# Altium PCB FPGA_Frontpanel_3_V1.PcbDoc
Units mm, origin at the board's own origin, x right, y up, seen from the top; angles counter-clockwise.
Board outline 150 x 40 mm, 2 copper layers (Top Layer, Bottom Layer), stack 1.66 mm thick; 57 components, 24 nets, 128 pads, 42 vias.
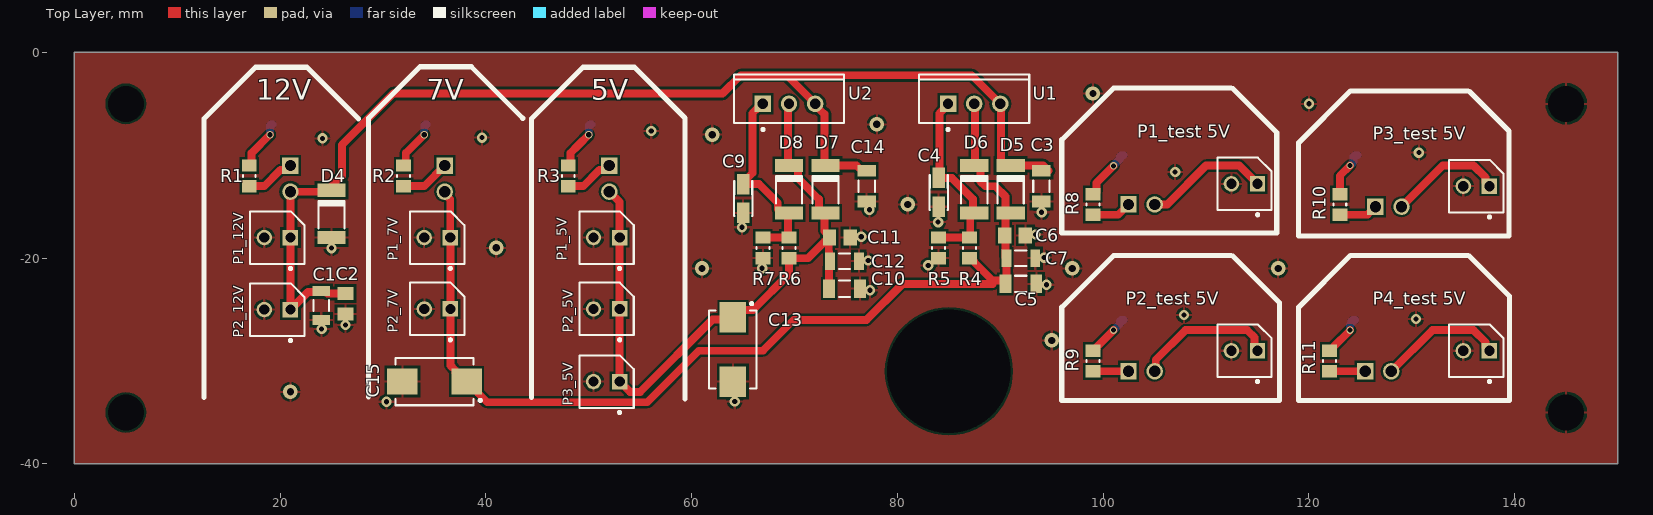
[diagram p0: Top Layer view]
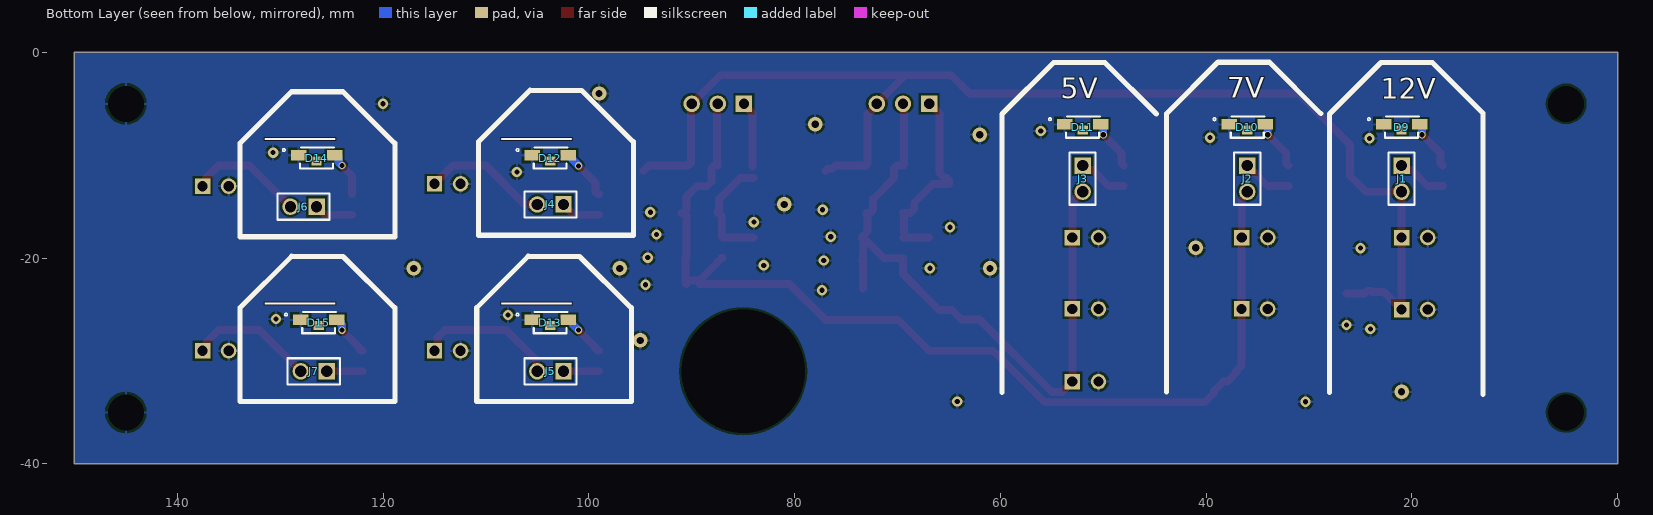
[diagram p1: Bottom Layer view, seen from below]
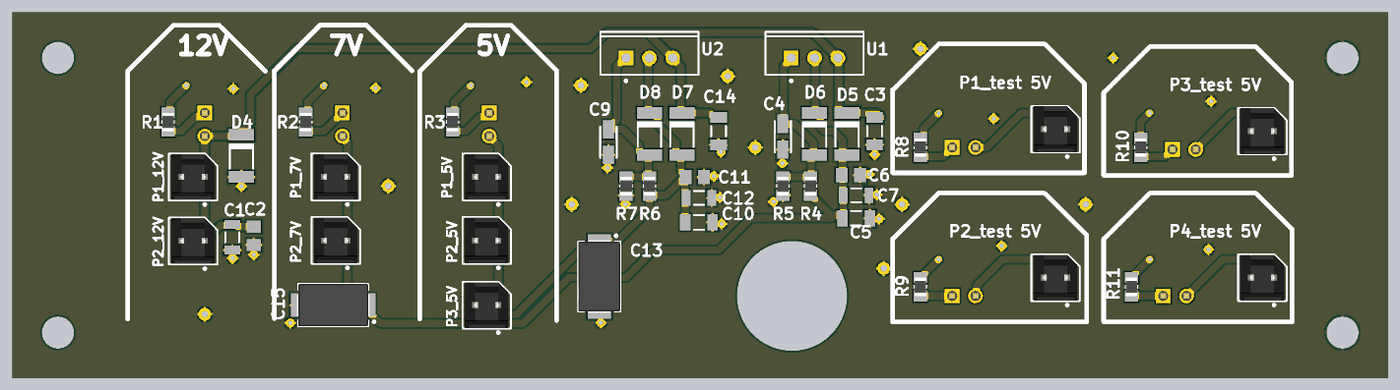
[diagram p2: 3D render of the assembled board from above, using the file's embedded part models]
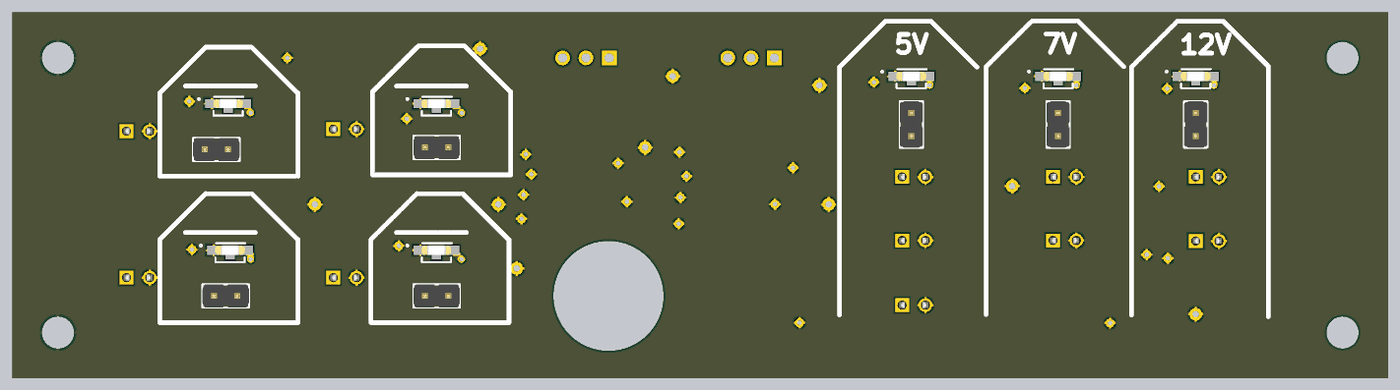
[diagram p3: 3D render of the assembled board from below, using the file's embedded part models]

## Layer stack, top to bottom
Top Solder: solder mask 0.0102, Solder Resist, Dk 3.5
Top Layer: signal copper 0.055
Dielectric1: dielectric 1.55, FR-4, Dk 4.8
Bottom Layer: signal copper 0.055
Bottom Solder: solder mask 0.0102, Solder Resist, Dk 3.5

## Board outline
0,-40 0,0 150,0 150,-40

## Design rules (kind name [scope] priority, off if disabled: settings)
Clearance clearance_polygons [InNamedPolygon('top_gnd_power')or InNamedPolygon('bottom_gnd_power') vs InNamedPolygon('top_gnd_uc')or InNamedPolygon('bottom_gnd_uc')] p1: gap=1.5 ignorepadtopadclearanceinfootprint=FALSE except(0: Arc-Hole Track-Hole SMDPad-Hole THPad-Hole Via-Hole Fill-Hole Poly-Hole Region-Hole Text-Hole)
Clearance ClearanceRoom [WithinRoom('less')  or WithinRoom('less1') or WithinRoom('less2') or WithinRoom('less3') or WithinRoom('less4')] p2: gap=0.15 ignorepadtopadclearanceinfootprint=FALSE
Clearance clearance_HP_class [InNetClass('high_power_net')] p3: gap=0.381 ignorepadtopadclearanceinfootprint=FALSE except(0: Arc-Hole Track-Hole SMDPad-Hole THPad-Hole Via-Hole Fill-Hole Poly-Hole Region-Hole Text-Hole)
Clearance "clearance_24V class" [InNetClass('24V_net')] p4: gap=0.254 ignorepadtopadclearanceinfootprint=FALSE except(0: Arc-Hole Track-Hole SMDPad-Hole THPad-Hole Via-Hole Fill-Hole Poly-Hole Region-Hole Text-Hole)
Clearance Clearance_1 [All] p5: gap=0.203 ignorepadtopadclearanceinfootprint=FALSE
FabricationTestPointUsage TestPointUsage [All] p1: valid=0 allowmultiple=FALSE
FabricationTestpoint Testpoint [All] p1: side=3 testpointundercomponent=TRUE minsize=1.016 maxsize=2.54 preferedsize=1.524 minholesize=0 maxholesize=1.016 preferedholesize=0.813 testpointgrid=0.025 allowsidetop=TRUE allowsidebottom=TRUE usegrid=TRUE gridtolerance=0
HoleSize [All] p1: absolutevalues=TRUE maxlimit=6 minlimit=0.025 maxpercent=80.000 minpercent=20.000
PolygonConnect PolygonConnect_Power [(InNet('+5V') OR InNet('-24VBUS'))] p1: connectstyle=Relief reliefconductorwidth=2.54 reliefentries=4 polygonreliefangle="90 Angle" airgapwidth=0.254
PolygonConnect [All] p2: connectstyle=Relief reliefconductorwidth=0.254 reliefentries=4 polygonreliefangle="90 Angle" airgapwidth=0.254
RoutingVias ViasRoom [WithinRoom('less')  or WithinRoom('less1') or WithinRoom('less2') or WithinRoom('less3') or WithinRoom('less4')] p1: holewidth=0.3 width=0.45 viastyle="Through Hole" minholewidth=0.3 minwidth=0.45 maxholewidth=0.3 maxwidth=0.45
RoutingVias [All] p2: holewidth=0.5 width=0.7 viastyle="Through Hole" minholewidth=0.3 minwidth=0.5 maxholewidth=0.711 maxwidth=1.27
SilkToSolderMaskClearance SilkscreenOverComponentPads [IsPad] p1: minsilkscreentomaskgap=0.254 clearancetoexposedcopper=TRUE
SolderMaskExpansion [All] p1: expansion=0.102 istentingtop=FALSE
Width WidthRoom [WithinRoom('less')  or WithinRoom('less1') or WithinRoom('less2') or WithinRoom('less3') or WithinRoom('less4')] p1: maxlimit=0.3 minlimit=0.3 preferedwidth=0.3
Width Width_HC_class [InNetClass('High_Current_net')] p2: maxlimit=15.24 minlimit=1.524 preferedwidth=1.524
Width Width_HP_class [InNetClass('High_Power_net')] p3: maxlimit=1.016 minlimit=1.016 preferedwidth=1.016
Width "Width_24V class" [InNetClass('24V_net')] p4: maxlimit=0.762 minlimit=0.762 preferedwidth=0.762
Width Width_1 [All] p5: maxlimit=0.762 minlimit=0.762 preferedwidth=0.762 minimp=50.000000 maximp=50.000000 favimp=50.000000
26 further rules are at their usual default settings.

## Classes and differential pairs
net class 24V_net: +12V

## Components (designator, comment, footprint, x,y, rotation, side; value= is the part's Value field where it differs from the comment)
C1 "100uF" CAPC1206(3216)190_L 24,-24.6 r90 top
C2 "100n" CAPC2013X88X50ML20T25 26.35,-24.432 r90 top
C3 "CAP 10uF 25V 1206(3216)" CAPC1206(3216)190_N 94,-13 r90 top value=10uF
C4 "4,7 µF" "A Package" 84,-12.2 r270 top
C5 "10uF" CAPC1206(3216)190_N 92,-22.512 r180 top
C6 "100n" CAPC2013X88X50ML20T25 91.429,-17.781 r180 top
C7 "100uF" CAPC1206(3216)190_L 92,-20 r180 top
C9 "4,7 µF" "A Package" 65,-12.8 r270 top
C10 "10uF" CAPC1206(3216)190_N 74.855,-22.959 r180 top
C11 "100n" CAPC2013X88X50ML20T25 74.4,-18 r180 top
C12 "100uF" CAPC1206(3216)190_L 74.855,-20.291 r180 top
C13 "10 µF" KEMT-520-D_Low 64,-28.875 r270 top
C14 "CAP 10uF 25V 1206(3216)" CAPC1206(3216)190_N 77,-13 r90 top value=10uF
C15 "10 µF" KEMT-520-D_Low 35,-32 r180 top
D4 "LL4007" LL4007 25,-18 r90 top
D5 "LL4007" LL4007 91,-15.6 r90 top
D6 "LL4007" LL4007 87.46,-15.6 r90 top
D7 "LL4007" LL4007 73,-15.6 r90 top
D8 "LL4007" LL4007 69.46,-15.6 r90 top
D9 "155124GS73200" 1204 21,-7 r180 bottom
D10 "155124GS73200" 1204 36,-7 r180 bottom
D11 "155124GS73200" 1204 52,-7 r180 bottom
D12 "155124YS73200" 1204 103.75,-10 r180 bottom
D13 "155124YS73200" 1204 103.75,-26 r180 bottom
D14 "155124YS73200" 1204 126.46,-10 r180 bottom
D15 "155124YS73200" 1204 126.25,-26 r180 bottom
J1 "61300211121" 61300211121 21,-11 r270 bottom
J2 "61300211121" 61300211121 36,-11 r270 bottom
J3 "61300211121" 61300211121 52,-11 r270 bottom
J4 "61300211121" 61300211121 102.46,-14.781 r0 bottom
J5 "61300211121" 61300211121 102.46,-31 r0 bottom
J6 "61300211121" 61300211121 126.46,-15 r0 bottom
J7 "61300211121" 61300211121 125.46,-31 r0 bottom
P1_5V "5V" 66100211622 53,-18 r0 top
P1_7V "5V" 66100211622 36.54,-18 r0 top
P1_12V "12V" 66100211622 21,-18 r0 top
"P1_test 5V" "66100211622" 66100211622 115,-12.781 r0 top
P2_5V "5V" 66100211622 53,-24.939 r0 top
P2_7V "5V" 66100211622 36.553,-24.939 r0 top
P2_12V "12V" 66100211622 21,-25 r0 top
"P2_test 5V" "66100211622" 66100211622 115,-29 r0 top
P3_5V "5V" 66100211622 53,-32 r0 top
"P3_test 5V" "66100211622" 66100211622 137.54,-13 r0 top
"P4_test 5V" "66100211622" 66100211622 137.54,-29 r0 top
R1 "21k" YAGO-RC0805_M 17,-12 r270 top
R2 "11k" YAGO-RC0805_M 32,-12 r270 top
R3 "6k8" YAGO-RC0805_M 48,-12 r270 top
R4 "270" YAGO-RC0805_M 87,-19 r270 top
R5 "1k" YAGO-RC0805_M 84,-19 r90 top
R6 "270" YAGO-RC0805_M 69.46,-19 r270 top
R7 "1k" YAGO-RC0805_M 66.92,-19 r90 top
R8 "330" YAGO-RC0805_M 99,-14.781 r270 top
R9 "330" YAGO-RC0805_M 99,-30 r270 top
R10 "330" YAGO-RC0805_M 123,-14.781 r270 top
R11 "330" YAGO-RC0805_M 122,-30 r270 top
U1 "LM317AT/NOPB" NDE0003A 87.46,-5 r0 top
U2 "LM317AT/NOPB" NDE0003A 69.46,-5 r0 top

## Footprints (in the part's own frame and the unit in brackets; to place one, negate y for a bottom-side part, rotate by r counter-clockwise, add the part's x,y. Pads: shape width x height; smd on the part's side, far side on the other; paste and mask are expansions set on the pad)
1204 [mm] "Chip LED, 2-Leads, Body 1.0x3.2mm"
  rect 1.5x1 smd: 1(-1.75,0) 2(1.75,0)
  rect 1x0.9 smd: 3(0,-0.55)
  silkscreen extent -3.3,-1.3 1.68,0.76, body extent -1.6,-0.5 1.6,0.5, height 1.49
61300211121 [mm] "2Pol; gerade; WR-PHD 2.54 mm THT Pin Header"
  rect 1.6x1.6 hole 1.1: 1(0,0)
  round 1.6 hole 1.1: 2(2.54,0)
  silkscreen extent -1.27,-1.27 3.81,1.27, body extent -1.27,-1.27 3.81,1.27, height 8.57
66100211622 [mm] "2 Pins, stehend 2.54mm Intercom Stiftleiste WR-WTB"
  rect 1.5x1.5 hole 1: 1(0,0)
  round 1.5 hole 1: 2(-2.54,0)
  silkscreen extent -3.91,-3.12 1.37,2.55, body extent -3.66,-2.5 1.12,2.5, height 11.33
"A Package" [mm] "A Package; Low Density"
  rect 2x1.2 smd: 1(0,0) 2(2.8,0)
  silkscreen extent -0.3,-0.9 3.1,0.9
CAPC1206(3216)190_L [mm] "Chip Capacitor, Body 3.2x1.6mm, Height 1.9mm, IPC High Density"
  rect 0.95x1.7 smd: 1(-1.4,0) 2(1.4,0)
  silkscreen extent -0.55,-0.75 0.55,0.75, body extent -1.7,-0.9 1.7,0.9, height 1.9
CAPC1206(3216)190_N [mm] "Chip Capacitor, Body 3.2x1.6mm, Height 1.9mm, IPC Medium Density"
  rect 1.15x1.8 smd: 1(-1.5,0) 2(1.5,0)
  silkscreen extent -0.55,-0.8 0.55,0.8, body extent -1.7,-0.9 1.7,0.9, height 1.9
CAPC2013X88X50ML20T25 [mm] "Chip Capacitor, 2-Leads, Body 2.00x1.25mm, IPC Low Density"
  rect 1.3x1.55 smd: 1(-1,0) 2(1,0)
  body extent -1.1,-0.72 1.1,0.72, height 0.88
KEMT-520-D_Low [mm] "Molded Capacitor, 2-Leads, Body 7.6x4.6mm, IPC Low Density"
  rect 2.95x2.55 smd: 1(-3.125,0) 2(3.125,0)
  silkscreen extent -4.57,-2.3 3.8,2.3, body extent -4.02,-2.3 4.02,2.3, height 3.1
LL4007 [mm] "MELF Diode, 2-Leads, Body 5,00x2,50mm, IPC High Density"
  rect 1.279x2.75 smd: 1(0,0) 2(4.6,0)
  silkscreen extent 0.9,-1.28 3.57,1.28, body extent -0.3,-1.34 4.9,1.35, height 2.69
NDE0003A [mm] "FM, 3-Leads, Body 10.7x4.7mm, Pitch 2.54mm"
  rect 1.6x1.6 hole 1: 1(-2.54,0)
  round 1.6 hole 1: 2(0,0) 3(2.54,0)
  silkscreen extent -5.35,-2.62 5.35,2.85, body extent -5.4,-1.9 5.4,2.9, height 19.4
YAGO-RC0805_M [mm] "Chip Resistor, 2-Leads, Body 2.00x1.25mm, IPC Low Density"
  rect 1.2x1.45 smd: 1(-1,0) 2(1,0)
  silkscreen extent -0.1,-0.63 0.1,0.63, body extent -1,-0.62 1,0.63, height 0.6

## Part data
C1 C7 C12: library part CMP-00469-2, "CAP 100uF 6.3V ±20% 1206 (3216 Metric) Thickness 1.9mm SMD", Case-EIA=1206, Case-Metric=3216, Manufacturer="WURTH ELEKTRONIK", Manufacturer Part Number=885012108005, Rated Voltage="6.3 V", Supplier Part Number=2495155, Tolerance=Â±20%, ComponentLink1Description=2326302.pdf, ComponentLink1URL=http://www.farnell.com/cad/2326302.pdf, ComponentLink2Description=1958456.pdf, ComponentLink2URL=http://www.farnell.com/datasheets/1958456.pdf, Max Thickness="1.9 mm", PartNumber=885012108005, Supplier=Farnell, Technology=SMT
C2 C6 C11: library part CMP-001-0082-2, "generic 0805 COG oder X7R Vielschichtkondensatoren max. +/-10%"
C3 C5 C10 C14: library part CMP-00471-2, "CAP 10uF 25V -20% to +80% 1206 (3216 Metric) Thickness 1.9mm SMD", Case-EIA=1206, Case-Metric=3216, Manufacturer="Wurth Electronics Inc.", Manufacturer Part Number=885012208069, Operating Temperature="-55°C ~ 125°C", Package / Case="1206 (3216 Metric)", PartNumber="885 012 208 069", Rated Voltage="25 V", Supplier Part Number=732-7574-2-ND, Temperature Coefficient=X7R, Tolerance="-20% to +80%", ComponentLink1Description=885012208069.pdf, ComponentLink1URL=http://katalog.we-online.de/pbs/datasheet/885012208069.pdf, Max Thickness="1.9 mm", Mounting Type="Surface Mount, MLCC", Packaging="Tape & Reel (TR)", Part Status=Active, Size / Dimension="0.126\" L x 0.063\" W (3.20mm x 1.60mm)", Supplier=Digi-Key, Technology=SMT, Thickness (Max)="0.075\" (1.90mm)"
C4: library part CMP-001-0039-5, "4,7 µF; 6V; Gr. A; T491A475K006AT", Capacitance=4.7µF, ESR (Equivalent Series Resistance)="6 Ohm", Lifetime @ Temp.="2000 Hrs @ 85°C", Manufacturer=KEMET, Manufacturer Size Code=A, Operating Temperature="-55°C ~ 125°C", Package / Case="1206 (3216 Metric)", PartNumber=T491A475K006AT, Supplier Part Number=399-9717-1-ND, Tolerance=±10%, Voltage - Rated=6.3V, ComponentLink1Description=KEM_T2005_T491.pdf, ComponentLink1URL=http://www.kemet.com/Lists/ProductCatalog/Attachments/254/KEM_T2005_T491.pdf, Failure Rate=-, Features="General Purpose", Height - Seated (Max)="0.071\" (1.80mm)", Lead Spacing=-, Mounting Type="Surface Mount", Packaging="Cut Tape (CT)", Part Status=Active, Size / Dimension="0.126\" L x 0.063\" W (3.20mm x 1.60mm)", Supplier=Digi-Key, Type=Molded
C9: library part CMP-001-0039-3, "4,7 µF; 6V; Gr. A; T491A475K006AT", Capacitance=4.7µF, ESR (Equivalent Series Resistance)="6 Ohm", Lifetime @ Temp.="2000 Hrs @ 85°C", Manufacturer=KEMET, Manufacturer Size Code=A, Operating Temperature="-55°C ~ 125°C", Package / Case="1206 (3216 Metric)", PartNumber=T491A475K006AT, Supplier Part Number=399-9717-1-ND, Tolerance=±10%, Voltage - Rated=6.3V, ComponentLink1Description=KEM_T2005_T491.pdf, ComponentLink1URL=http://www.kemet.com/Lists/ProductCatalog/Attachments/254/KEM_T2005_T491.pdf, Failure Rate=-, Features="General Purpose", Height - Seated (Max)="0.071\" (1.80mm)", Lead Spacing=-, Mounting Type="Surface Mount", Packaging="Cut Tape (CT)", Part Status=Active, Size / Dimension="0.126\" L x 0.063\" W (3.20mm x 1.60mm)", Supplier=Digi-Key, Type=Molded
C13 C15: library part CMP-001-0033-3, "10 µF, 35V, 125 mOhm, Gr. D / partnumb: T495D106K035ATE125", Capacitance=10µF, ESR (Equivalent Series Resistance)="125 mOhm", Lifetime @ Temp.="2000 Hrs @ 85°C", Manufacturer=KEMET, Manufacturer Size Code=D, Operating Temperature="-55°C ~ 125°C", Package / Case="2917 (7343 Metric)", PartNumber=T495D106K035ATE125, Supplier Part Number=399-10292-1-ND, Tolerance=±10%, Voltage - Rated=35V, ComponentLink1Description=docfinder?Partnumber=T495D106K035ATE300, ComponentLink1URL=http://www.kemet.com/docfinder?Partnumber=T495D106K035ATE300, Failure Rate=-, Features="General Purpose", Height - Seated (Max)="0.122\" (3.10mm)", Lead Spacing=-, Mounting Type="Surface Mount", Packaging="Cut Tape (CT)", Part Status=Active, Size / Dimension="0.287\" L x 0.169\" W (7.30mm x 4.30mm)", Supplier=Digi-Key, Type=Molded
D4 D5 D6 D7 D8: library part CMP-001-0049-2, "LL4007;  Vf 1,1V @ 1A, If = 1A", Betriebstemperatur, max.=175, Manufacturer="TAIWAN SEMICONDUCTOR", PartNumber="LL4007G L2", Supplier Part Number=2677381, Anzahl der Pins=-, Bauform - Diode=DO-213, ComponentLink1Description=2182652.pdf, ComponentLink1URL=http://www.farnell.com/datasheets/2182652.pdf, Diodenkonfiguration=Einfach, Durchlassspannung Vf max.=1.1, Durchlassstrom (mittlerer) If(AV)=1, Periodische Sperrspannung Vrrm, max.=1, Produktpalette=-, Sperrerholzeit Trr, max.=-, Spitzendurchlassstrom Ifsm, max.=25, Supplier=Farnell, SVHC="No SVHC (20-Jun-2016", Verpackung=Gurtabschnitt
D9 D10 D11: library part CMP-001-0164-1, "Single Color LED, Green, Water Clear, 2mm", Color=Green, Forward Current-Max=25mA, Max Operating Temperature=85°C, Min Operating Temperature=-40°C, Lens Style="WATER CLEAR", Luminous Intensity-Nom=600mcd, Mount="Surface Mount", Number of Functions=1, Number of Pins=3, Optoelectronic Device Type="SINGLE COLOR LED", Overall Height=1mm, Packaging="Tape and Reel", REACH SVHC=Yes, RoHS Compliant=Yes, Shape=Rectangular, Size=2mm, Viewing Angle=120°
D12 D13 D14 D15: library part CMP-00543-1, "Single Color LED, Yellow, Water Clear, 2mm", Color=Yellow, Forward Current-Max=25mA, Max Operating Temperature=85°C, Min Operating Temperature=-40°C, Lens Style="WATER CLEAR", Luminous Intensity-Nom=130mcd, Mount="Surface Mount", Number of Functions=1, Number of Pins=3, Optoelectronic Device Type="SINGLE COLOR LED", Overall Height=1mm, Packaging="Tape and Reel", REACH SVHC=Yes, RoHS Compliant=Yes, Shape=Rectangular, Size=2mm, Viewing Angle=120°
J1 J2 J3 J4 J5 J6 J7: library part CMP-001-0071-2, "2Pol; gerade; WR-PHD 2.54 mm THT Pin Header", Current Rating="3 A", Flammability Rating="UL 94 V-0", Insulation Resistance="1 GOhms", Manufacturer="Wurth Electronics", Supplier Part Number=710-61300211121, Voltage Rating="250 V", Accessory Type=-, Application="Wire to Board", Brand="Wurth Electronics", ComponentLink1Description=6130xx11121-538006.pdf, ComponentLink1URL=http://www.mouser.com/ds/2/445/6130xx11121-538006.pdf, Contact Gender="Pin (Male)", Contact Material="Copper Alloy", Contact Plating=Gold, Contact Type=-, Housing Gender=-, Housing Material="Polybutylene Terephthalate (PBT)", Latching Type=Unlatched, Manufacturer Part Number=61300211121, Mating Post Length="6 mm", Minimum Order Quantity=1, Mounting Angle=Straight, Mounting Style="Straight Pin", Number of Positions="2 Position", Number of Rows="1 Row", Packaging=Bulk, PartNumber=61300211121, Pitch="2.54 mm", Product=Headers, Reeling=False, RoHS - Mouser=Y, Row Spacing=-, Series=WR-PHD, Standard Pack Qty=1000, Supplier=Mouser, Termination Post Length="3 mm", Termination Style="Through Hole", Type="Pin Strip"
P1_5V P1_7V P1_12V P2_5V P2_7V P2_12V P3_5V: library part CMP-001-0161-A.3, "WR-WTB 2.54 mm Male Vertical Shrouded Header 2 Pins", Manufacturer="Wurth Electronics", PartNumber=66100211622, Supplier Part Number=732-14102-ND, Supplier=Digi-Key
"P1_test 5V" "P2_test 5V" "P3_test 5V" "P4_test 5V": library part CMP-001-0161-A.3, "WR-WTB 2.54 mm Male Vertical Shrouded Header 2 Pins", Manufacturer="Wurth Electronics", Supplier Part Number=732-14102-ND, PartNumber=66100211622, Supplier=Digi-Key
R1 R2 R3 R4 R5 R6 R7 R8 R9 R10 R11: library part CMP-001-0027-2, "0805 Yageo Standard BlackBox Resistors", Manufacturer=Yageo, Operating Temperature="-55°C ~ 155°C", Package / Case="0805 (2012 Metric)", Power (Watts)="0.125W, 1/8W", Supplier Device Package=0805, Temperature Coefficient=±200ppm/°C, Tolerance=±1%, ComponentLink1Description=PYu-RC_Group_51_RoHS_L_7.pdf, ComponentLink1URL=http://www.yageo.com/documents/recent/PYu-RC_Group_51_RoHS_L_7.pdf, Composition="Thick Film", Failure Rate=-, Features="Moisture Resistant", Height - Seated (Max)="0.024\" (0.60mm)", Packaging=Digi-Reel®, Part Status=Active, Size / Dimension="0.079\" L x 0.049\" W (2.00mm x 1.25mm)"
U1 U2: library part CMP-00535-1, "3-Terminal Adjustable Regulator, 3-pin TO-220, Pb-Free", Manufacturer="Texas Instruments", PackageTopMarking="NSUZXYTTE#*LM317AT P+", PowerWise=N, ComponentLink1Description="Datasheet URL", ComponentLink1URL=http://www.ti.com/general/docs/lit/getliterature.tsp?genericPartNumber=LM317-N&fileType=pdf, CompType="LDO IC", PackageDescription="TO-220, Molded, 3 Lead, Straight", PackageReference=NDE0003A, PinCount=3, RoHS=Y

## Free pads (board coordinates)
  round 3.302 hole 3.505 unplated: 0(5,-35) 0(5,-5) 0(145,-35) 0(145,-5)
  round 3.302 hole 12 unplated: 0(85,-31)

## Via types
v1: diameter 1, hole 0.5, Top Layer to Bottom Layer, 25 vias
v2: diameter 1.4, hole 0.711, Top Layer to Bottom Layer, 10 vias
v3: diameter 0.7, hole 0.5, Top Layer to Bottom Layer, 7 vias

## Nets (pads, with @x,y where several pads share a name; then routed paths per layer and width w, separated by ;. In a path a pad name is that pad's centre, name@x,y a point inside that pad or via, vN(x,y) a via of type N, cw(c..) or ccw(c..) an arc to the next point about the centre after c; other vN are vias at no path point)
+5V: C10.2 C11.2 C12.2 C13.1 D7.1 D8.2 J3.2 P1_5V.1 P2_5V.1 P3_5V.1 R6.2 U2.2 | length 66.9
  Top Layer w0.762: J3.2 53,-14.54 P1_5V.1 P2_5V.1 P3_5V.1 54,-33 55,-33 62.028,-25.972 63.778,-25.972 C13.1 64.722,-25.028 65.972,-25.028 69.465,-21.535 69.465,-20.005 71.3,-20.005 72.911,-18.394 73.131,-18.394 73.4,-18.125 C11.2 ; U2.2 69.36,-5.1 69.36,-10.9 D8.2 70.073,-11 70.331,-11.258 70.331,-12.236 72.359,-14.264 72.359,-15.342 72.617,-15.6 D7.1 73,-15.758 72.9,-15.858 72.9,-17.375 73.422,-17.897 C11.2@73.422,-18.002 ; C11.2@73.322,-18.399 73.322,-19.375 73.361,-19.414 73.361,-20.197 C12.2 73.361,-20.385 73.361,-20.76 73.355,-20.766 C10.2
+7V: C5.2 C6.2 C7.2 C15.1 D5.1 D6.2 J2.2 P1_7V.1 P2_7V.1 R4.2 U1.2 | length 101.2
  Top Layer w0.762: J2.2 36,-13.767 36.54,-14.307 P1_7V.1 36.553,-18.013 P2_7V.1 36.553,-30.428 37.031,-30.906 37.031,-31.106 37.925,-32 38.325,-32 39.219,-32.894 39.219,-33.094 40.125,-34 55.682,-34 60.682,-29 66.92,-29 69.92,-26 77,-26 80.488,-22.512 89.259,-22.512 ; R4.2 87.125,-20 87.425,-20.3 87.425,-20.353 89.259,-22.186 90.306,-22.186 90.5,-22.38 C5.2 90.6,-22.412 C7.2 90.514,-19.914 90.514,-17.867 C6.2 90.51,-17.7 90.51,-15.858 D5.1@90.768,-15.6 ; U1.2 87.541,-5.081 87.541,-10.919 D6.2 87.823,-11 88.081,-11.258 88.081,-12.562 88.528,-13.009 89.51,-13.009 90.51,-14.009 90.51,-15.342 D5.1@90.768,-15.6 ; D5.1 D5.1@90.768,-15.6
+12V: C1.2 C2.2 C3.2 C14.2 D4.2 D5.2 D7.2 J1.2 P1_12V.1 P2_12V.1 U1.3 U2.3 | length 119.5
  Top Layer w0.762: C2.2 24.607,-23.432 24.375,-23.2 C1.2 23.906,-23.294 22.706,-23.294 P2_12V.1 P1_12V.1 J1.2 24.46,-13.54 26,-12 26,-9 31,-4 63,-4 64.77,-2.23 69.23,-2.23 ; C14.2 76.806,-11.306 76.336,-11.306 76.035,-11.005 73.005,-11.005 D7.2 73,-10.842 72.9,-10.742 72.9,-6.005 72,-5.105 U2.3 69.23,-2.23 ; C3.2@94.675,-11.5 94.175,-11 D5.2 90.34,-11 90.081,-10.742 90.081,-5.081 U1.3 87.23,-2.23 69.23,-2.23
GND: "P1_test 5V.2" "P2_test 5V.2" "P3_test 5V.2" "P4_test 5V.2" C1.1 C2.1 C3.1 C4.2 C5.1 C6.1 C7.1 C9.2 C10.1 C11.1 C12.1 C13.2 C14.1 C15.2 D4.1 D9.1 D10.1 D11.1 D12.1 D13.1 D14.1 D15.1 P1_5V.2 P1_7V.2 P1_12V.2 P2_5V.2 P2_7V.2 P2_12V.2 P3_5V.2 pad.0@145,-5 pad.0@145,-35 R5.1 R7.1
  other v1: 30.33,-33.962 64.182,-33.926 24.036,-26.885 26.347,-26.494 130.393,-25.925 107.849,-25.534 77.339,-23.116 94.478,-22.583 66.849,-20.983 82.993,-20.698 77.161,-20.236 94.265,-19.951 24.996,-19.027 76.486,-17.925 93.412,-17.711 64.893,-17 83.953,-16.502 94.016,-15.542 77.268,-15.293 106.995,-11.631 130.678,-9.746 24.107,-8.359 39.611,-8.288 56.075,-7.648 120,-5
  other v2: 21,-33 95,-28 61,-21 97,-21 117,-21 41,-19 81,-14.781 62,-8 78,-7 99,-4
NetC4_1: C4.1 D6.1 R4.1 R5.2 U1.1 | length 17.7
  Top Layer w0.762: R5.2 84.009,-18.009 86.991,-18.009 87.081,-17.919 87.081,-15.858 87.34,-15.6 D6.1 87.46,-15.465 87.337,-15.342 87.337,-14.264 85.297,-12.224 84.219,-12.224 84.195,-12.2 C4.1 ; 84.081,-11.081 84.081,-5.929 84.501,-5.509 84.501,-5.419 U1.1
NetC9_1: C9.1 D8.1 R6.1 R7.2 U2.1 | length 19.8
  Top Layer w0.762: R7.2 66.925,-18.005 69.455,-18.005 R6.1 69.36,-17.9 69.36,-15.7 D8.1 68.724,-15.6 68.366,-15.242 68.366,-14.611 66.56,-12.805 65.219,-12.805 65.214,-12.8 C9.1 65,-12.4 65.219,-12.181 65.454,-12.181 65.9,-11.735 65.9,-5.925 66.406,-5.419 66.501,-5.419 U2.1
NetD9_2: D9.2 R1.1 | length 5
  Top Layer w0.762: R1.1 17.209,-10.791 17.209,-9.791 v3(19,-8)
  Bottom Layer w0.762: v3(19,-8) 19,-7.119 19.119,-7 D9.2
NetD10_2: D10.2 R2.1 | length 5
  Top Layer w0.762: R2.1 32.209,-10.791 32.209,-9.791 v3(34,-8)
  Bottom Layer w0.762: v3(34,-8) 34,-7.119 34.119,-7 D10.2
NetD11_2: D11.2 R3.1 | length 5
  Top Layer w0.762: R3.1 48.209,-10.791 48.209,-9.791 49,-9 v3(50,-8)
  Bottom Layer w0.762: v3(50,-8) 50,-7.119 50.119,-7 D11.2
NetD12_2: D12.2 R8.1 | length 5.2
  Top Layer w0.762: R8.1 99.125,-13.781 99.344,-13.562 99.344,-12.684 v3(101,-11.028)
  Bottom Layer w0.762: v3(101,-11.028) 101,-11 101.631,-10.369 101.631,-10.119 101.75,-10 D12.2
NetD13_2: D13.2 R9.1 | length 4.5
  Top Layer w0.762: R9.1 99.125,-29 99.344,-28.781 99.344,-28.656 v3(101,-27)
  Bottom Layer w0.762: v3(101,-27) 101.631,-26.369 101.631,-26.119 101.75,-26 D13.2
NetD14_2: D14.2 R10.1 | length 4.6
  Top Layer w0.762: R10.1 123,-12 v3(124,-11)
  Bottom Layer w0.762: v3(124,-11) 124.341,-10.659 124.341,-10.119 124.46,-10 D14.2
NetD15_2: D15.2 R11.1 | length 4.3
  Top Layer w0.762: R11.1 122.125,-29 122.344,-28.781 122.344,-28.656 v3(124,-27)
  Bottom Layer w0.762: v3(124,-27) 124,-26.5 124.131,-26.369 124.131,-26.119 124.25,-26 D15.2
NetJ1_1: J1.1 R1.2 | length 4.8
  Top Layer w0.762: R1.2 18.46,-13 20.041,-11.419 20.581,-11.419 J1.1
NetJ2_1: J2.1 R2.2 | length 4.8
  Top Layer w0.762: R2.2 34,-13 J2.1
NetJ3_1: J3.1 R3.2 | length 4.8
  Top Layer w0.762: R3.2 49.46,-13 51.041,-11.419 51.581,-11.419 J3.1
NetJ4_1: J4.1 R8.2 | length 3.9
  Top Layer w0.762: R8.2 101.46,-15.781 J4.1
NetJ4_2: "P1_test 5V.1" J4.2 | length 12.3
  Top Layer w0.762: J4.2 105.003,-14.779 106.221,-14.779 110,-11 113.219,-11 115,-12.781
NetJ5_1: J5.1 R9.2 | length 3.5
  Top Layer w0.762: R9.2 J5.1
NetJ5_2: "P2_test 5V.1" J5.2 | length 13.7
  Top Layer w0.762: J5.2 105.112,-30.888 105.112,-29.888 108,-27 114,-27 114.704,-27.704 114.704,-28.704 115,-29
NetJ6_1: J6.1 R10.2 | length 3.8
  Top Layer w0.762: R10.2 125.679,-15.781 J6.1
NetJ6_2: "P3_test 5V.1" J6.2 | length 11.3
  Top Layer w0.762: J6.2 133,-11 136,-11 137.171,-12.171 137.171,-12.631 137.54,-13
NetJ7_1: J7.1 R11.2 | length 3.5
  Top Layer w0.762: R11.2 J7.1
NetJ7_2: "P4_test 5V.1" J7.2 | length 12.3
  Top Layer w0.762: J7.2 132,-27 136,-27 137.171,-28.171 137.171,-28.631 137.54,-29
pads on no net: D9.3 D10.3 D11.3 D12.3 D13.3 D14.3 D15.3

## Polygon pours and split planes (outlines as drawn)
GND on Top Layer "top gnd" (solid, remove dead copper, pour order 0): 0,-40 0,0 150,0 150,-40
GND on Bottom Layer "bot gnd" (solid, remove dead copper, pour order 1): 0,-40 0,0 150,0 150,-40

## Silkscreen, mask and mechanical layers (free items; w line width, h text height)
Top Overlay:
  lines w0.5: 12.604,-33.514 12.604,-6.448 17.617,-1.435 ; 17.604,-1.448 22.604,-1.448 27.604,-6.448 ; 28.584,-33.47 28.584,-6.403 33.597,-1.39 ; 33.584,-1.403 38.584,-1.403 43.584,-6.403 ; 44.43,-33.514 44.43,-6.448 49.443,-1.435 ; 49.43,-1.448 54.43,-1.448 59.35,-6.369 59.35,-33.679 ; 95.969,-24.747 95.969,-33.836 117.129,-33.836 117.129,-24.338 112.607,-19.816 ; 95.969,-8.461 95.969,-17.551 116.874,-17.551 116.874,-7.797 112.608,-3.53 ; 96.022,-24.747 101.022,-19.747 112.426,-19.747 ; 96.023,-8.461 101.023,-3.461 112.426,-3.461 ; 118.969,-24.747 118.969,-33.836 139.497,-33.836 139.497,-23.706 135.607,-19.816 ; 118.969,-8.747 118.969,-17.836 139.446,-17.836 139.446,-7.655 135.607,-3.816 ; 119.022,-24.747 124.022,-19.747 135.426,-19.747 ; 119.022,-8.747 124.022,-3.747 135.426,-3.747
  text "12V" at 17.7,-4.606 h2
  text "7V" at 34.24,-4.606 h2
  text "5V" at 50.24,-4.606 h2
Bottom Overlay:
  lines w0.5: 13.101,-33.252 13.079,-33.23 13.079,-5.921 18,-1 23,-1 ; 22.987,-0.987 28,-6 28,-33.066 ; 28.846,-5.955 33.846,-0.955 38.846,-0.955 ; 38.833,-0.942 43.846,-5.955 43.846,-33.021 ; 44.826,-6 49.826,-1 54.826,-1 ; 54.813,-0.987 59.826,-6 59.826,-33.066 ; 95.663,-8.692 95.663,-17.781 110.716,-17.781 110.716,-8.692 105.703,-3.679 ; 95.716,-8.692 100.716,-3.692 105.716,-3.692 ; 95.84,-24.827 95.84,-33.917 110.894,-33.917 110.894,-24.827 105.881,-19.814 ; 95.894,-24.827 100.894,-19.827 105.894,-19.827 ; 118.84,-24.827 118.84,-33.917 133.894,-33.917 133.894,-24.827 128.881,-19.814 ; 118.84,-8.827 118.84,-17.917 133.894,-17.917 133.894,-8.827 128.881,-3.814 ; 118.894,-24.827 123.894,-19.827 128.894,-19.827 ; 118.894,-8.827 123.894,-3.827 128.894,-3.827
  text "7V" at 37.955,-4.421 h2
  text "5V" at 54.136,-4.458 h2
  text "12V" at 23.024,-4.503 h2
  text "_____" at 108.46,-7.908 h2
  text "_____" at 131.46,-7.908 h2
  text "_____" at 108.46,-23.908 h2
  text "_____" at 131.46,-23.908 h2
M1_BoardOutline:
  the board outline again, w0.5
M12_titleBlock:
  lines w0.127: -10.932,-224.52 -10.932,-31.48 ; -10.932,-176.26 -5.852,-176.26 ; -10.932,-128 -5.852,-128 ; -10.932,-79.74 -5.852,-79.74 ; -10.924,-177.352 -10.924,15.688 ; -10.924,-129.092 -5.844,-129.092 ; -10.924,-80.832 -5.844,-80.832 ; -10.924,-32.572 -5.844,-32.572 ; -5.852,-219.44 -5.852,-36.56 ; -5.844,-172.272 -5.844,10.608 ; 125.998,-188.973 162.574,-188.973 ; 126.006,-141.805 162.582,-141.805 ; 126.228,-188.96 126.228,-219.44 161.788,-219.44 ; 126.236,-141.792 126.236,-172.272 161.796,-172.272 ; 135.118,-224.52 135.118,-219.44 ; 135.126,-177.352 135.126,-172.272 ; 162.525,-211.82 276.088,-211.82 ; 162.525,-204.2 276.088,-204.2 ; 162.525,-196.58 199.888,-196.58 ; 162.533,-164.652 276.096,-164.652 ; 162.533,-157.032 276.096,-157.032 ; 162.533,-149.412 199.896,-149.412 ; 199.888,-219.44 199.888,-204.2 199.888,-188.96 ; 199.896,-172.272 199.896,-157.032 199.896,-141.792 ; 208.143,-224.52 208.143,-219.44 ; 208.151,-177.352 208.151,-172.272 ; 208.151,10.608 208.151,15.688 ; 253.228,-219.44 253.228,-204.2 ; 253.236,-172.272 253.236,-157.032 ; 276.088,-176.26 281.168,-176.26 ; 276.088,-128 281.168,-128 ; 276.088,-79.74 281.168,-79.74 ; 276.088,-36.56 276.088,-219.44 ; 276.096,-129.092 281.176,-129.092 ; 276.096,-80.832 281.176,-80.832 ; 276.096,-32.572 281.176,-32.572 ; 276.096,10.608 276.096,-172.272 ; 281.168,-224.52 281.168,-31.48 ; 281.176,-177.352 281.176,15.688 ; 199.888,-188.96 162.525,-188.96 162.525,-219.44 276.088,-219.44 ; 199.888,-188.96 276.088,-188.96 276.088,-219.44 ; 199.896,-141.792 276.096,-141.792 276.096,-172.272 ; 199.896,-141.792 162.533,-141.792 162.533,-172.272 276.096,-172.272
  lines w0.254: 228.882,-188.338 228.882,-38.478 ; 228.882,-98.116 274.602,-98.116 274.602,-95.576 274.602,-76.578 ; 228.882,-76.578 274.602,-76.578 ; 228.882,-71.498 274.602,-71.498 274.602,-76.578 ; 228.89,-141.17 228.89,8.69 ; 228.89,-50.948 274.61,-50.948 274.61,-48.408 274.61,-29.41 ; 228.89,-29.41 274.61,-29.41 ; 228.89,-24.33 274.61,-24.33 274.61,-29.41
  text "1" at 25.322,12.259 h1.24
  text "3" at 171.118,12.259 h1.24
  text "4" at 244.016,12.259 h1.24
  text "A" at -9.019,-10.754 h1.24
  text "A" at 278.001,-10.754 h1.24
  text "Abstand von Frontpanelkante" at 231.43,-16.71 h1.24
  text "links unten zum Nullpunkt:" at 231.43,-19.25 h1.24
  text "13,9mm" at 231.43,-21.79 h1.24
  text "Mechanical Layer Definitionen:" at 231.43,-28.088 h1.24
  text "M1_boardOutline" at 231.43,-31.95 h1.24
  text "M11_text_topL" at 231.43,-35.708 h1.24
  text "M12_titleBlock" at 231.43,-38.248 h1.24
  text "M13_3D_topL" at 231.43,-40.788 h1.24
  text "M14_3D_botL" at 231.43,-43.328 h1.24
  text "M15_courtyard_topL" at 231.43,-45.584 h1.24
  text "M16_courtyard_botL" at 231.43,-48.124 h1.24
  text "B" at -9.019,-58.811 h1.24
  text "B" at 278.001,-58.811 h1.24
  text "C" at -9.019,-107.325 h1.24
  text "C" at 278.001,-107.325 h1.24
  text "ENGINEER:" at 163.066,-144.332 h1.24
  text "TITLE:" at 201.166,-144.332 h1.24
  text "PCB DESIGNER:" at 163.066,-151.825 h1.24
  text "D" at -9.019,-155.331 h1.24
  text "D" at 278.001,-155.331 h1.24
  text "EMBL - European" at 121.258,-157.998 h1.24
  text "DATE:" at 163.066,-159.572 h1.24
  text "PART NO.:" at 201.166,-159.572 h1.24
  text "REV:" at 254.506,-159.572 h1.24
  text "Molecular Biology Laboratory" at 127.608,-160.538 h1.24
  text "Meyerhofstrasse 1" at 127.608,-162.443 h1.24
  text ".Print_Date" at 164.336,-162.62 h1.24
  text "69117 Heidelberg" at 127.608,-165.618 h1.24
  text "FILE NAME:" at 163.066,-167.192 h1.24
  text "DWG NO:" at 201.166,-167.192 h1.24
  text "SCALE:" at 254.506,-167.192 h1.24
  text "Germany" at 127.608,-168.475 h1.24
  text ".PCB_FILE_NAME_NO_PATH" at 164.336,-170.24 h1.24
  text "1" at 25.322,-175.701 h1.24
  text "3" at 171.118,-175.701 h1.24
  text "4" at 244.016,-175.701 h1.24